# Altium PCB MainBoard.PcbDoc (part 2 of 2)
Units mm, origin at the board's own origin, x right, y up, seen from the top; angles counter-clockwise.
Board outline 100 x 91.6 mm, 4 copper layers (Top Signal, GND, PWR, Bottom Signal), stack 1.586 mm thick; 83 components, 119 nets, 486 pads, 208 vias.
Unrouted connection lines stored in the file: 7.
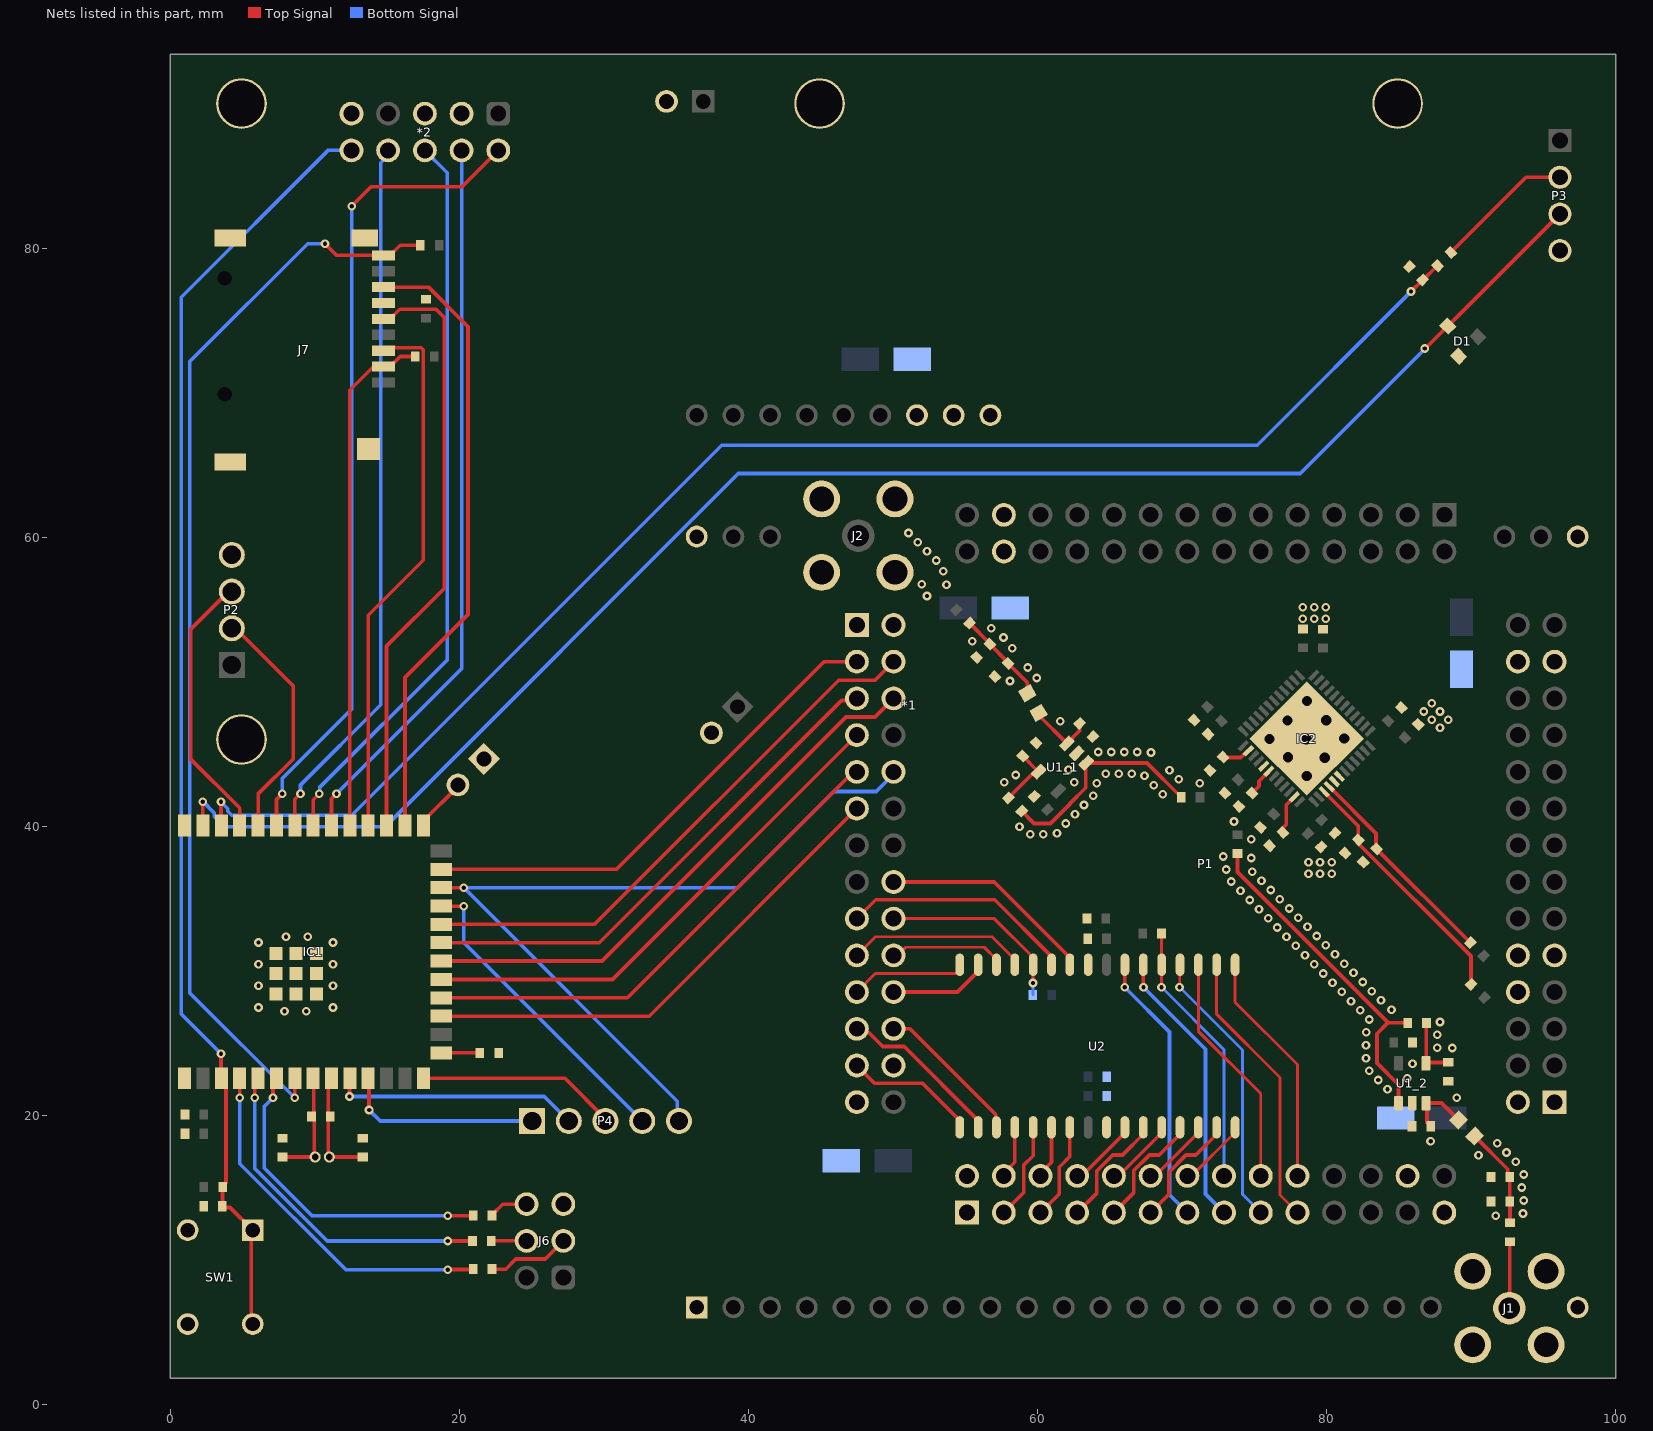
[diagram p4: the nets of this part, all layers, seen from the top]

## Via types
v1: diameter 0.6, hole 0.3, Top Signal to Bottom Signal, 117 vias
v2: diameter 0.6, hole 0.3, Top Signal to Bottom Signal, tented both sides, 82 vias
v3: diameter 1.27, hole 0.711, Top Signal to Bottom Signal, 9 vias

## Nets (pads, with @x,y where several pads share a name; then routed paths per layer and width w, separated by ;. In a path a pad name is that pad's centre, name@x,y a point inside that pad or via, vN(x,y) a via of type N, cw(c..) or ccw(c..) an arc to the next point about the centre after c; other vN are vias at no path point) (continued)
ANALOG_INB: J1.1 R15_2.1 | length 4.6
  Top Signal w0.264: J1.1@92.65,6.65 92.675,6.675 92.675,11.225 R15_2.1@92.7,11.25
CLK_32_N: C17.1 IC1.9 R5.2 Y1.1 | length 8.3
  Top Signal w0.254: IC1.9@11.15,22.55 10.915,22.315 R5.2@10.915,20.062 ; C17.1@13.315,17.112 10.915,17.112 10.915,19.762 R5.2@11.065,19.912 ; R5.2@10.915,20.062 R5.2@11.065,19.912 ; R5.2@10.915,20.062 R5.2@11.065,19.912
CLK_32_P: C18.1 IC1.8 R5.1 Y1.2 | length 8.2
  Top Signal w0.254: C18.1@7.765,17.112 10.115,17.112 10.115,17.22 9.963,17.371 9.963,19.714 R5.1@9.765,19.912 ; IC1.8@9.88,22.55 9.913,22.517 R5.1@9.913,20.061 ; R5.1@9.765,19.912 R5.1@9.913,20.061 ; R5.1@9.765,19.912 R5.1@9.913,20.061
ESP32.CS: IC1.18 P1.76 | length 35.6
  Top Signal w0.254: IC1.18@18.75,28.125 31.625,28.125 47.3,43.8 P1.76@47.853,43.8
ESP32.DATA_IRQ: IC1.25 P1.82 | length 34.7
  Top Signal w0.254: IC1.25@18.75,37.015 30.865,37.015 45.23,51.38 P1.82@47.5,51.38
ESP32.MISO: IC1.21 P1.80 | length 35.8
  Top Signal w0.254: IC1.21@18.75,31.935 29.685,31.935 46.446,48.696 47.356,48.696 P1.80@47.5,48.84
ESP32.MOSI: IC1.19 P1.78 | length 35.8
  Top Signal w0.254: IC1.19@18.75,29.395 30.595,29.395 P1.78@47.5,46.3
ESP32.PPS: IC1.24 P1.75 P4.5 | length 57
  Top Signal w0.254: IC1.24@18.75,35.745 18.755,35.75 v2(20.3,35.75)
  Bottom Signal w0.254: P4.5@35.19,19.6 35.075,19.715 35.075,20.975 v2(20.3,35.75) 39.258,35.75 45.91,42.402 48.852,42.402 50.04,43.59 P1.75@50.04,43.76
ESP32.SCLK: IC1.20 P1.79 | length 38.8
  Top Signal w0.254: IC1.20@18.75,30.665 29.864,30.665 46.749,47.55 48.75,47.55 P1.79@50.04,48.84
ESP32.SIO2: IC1.22 P1.81 | length 38.8
  Top Signal w0.254: IC1.22@18.75,33.205 29.355,33.205 46.246,50.096 48.755,50.096 P1.81@50.04,51.38
ESP32.SIO3: IC1.17 P1.74 | length 34.7
  Top Signal w0.254: IC1.17@18.75,26.855 33.135,26.855 P1.74@47.5,41.22
ESP_EN: *2.10 C21.2 IC1.3 R14.1 SW1.1 SW1.2 | length 89.6
  Top Signal w0.254: v2(3.5,24.25) 3.5,22.58 IC1.3@3.53,22.55 3.85,22.23 3.85,15.322 3.615,15.087 R14.1@3.615,15.037 ; C21.2@3.6,13.7 C21.2@3.608,13.707 ; R14.1@3.608,15.03 C21.2@3.608,13.707 ; SW1.2@5.7,5.55 5.6,5.65 5.6,11.95 SW1.1@5.7,12.05 4.132,13.618 3.697,13.618 C21.2@3.608,13.707
  Bottom Signal w0.254: v2(3.5,24.25) 0.75,27 0.75,76.6 10.91,86.76 *2.10@12.53,86.76
ESP_TCK: *2.4 IC1.32 | length 50.4
  Top Signal w0.254: IC1.32@11.15,40.05 11.15,41.9 v2(11.5,42.25)
  Bottom Signal w0.254: v2(11.5,42.25) 20.16,50.91 20.16,86.75 *2.4@20.15,86.76
ESP_TDI: *2.8 IC1.34 | length 49.4
  Top Signal w0.254: IC1.34@8.61,40.05 8.61,41.86 v2(9,42.25)
  Bottom Signal w0.254: v2(9,42.25) 9,42.85 14.55,48.4 14.55,85.427 14.561,85.438 14.561,85.913 15.07,86.423 *2.8@15.07,86.76
ESP_TDO: *2.6 IC1.33 | length 51.2
  Top Signal w0.254: IC1.33@9.88,40.05 9.88,41.83 v2(10.3,42.25)
  Bottom Signal w0.254: v2(10.3,42.25) 10.328,42.278 10.328,42.678 19.15,51.5 19.15,85.22 *2.6@17.61,86.76
ESP_TMS: *2.2 IC1.35 | length 56.8
  Top Signal w0.254: IC1.35@7.34,40.05 7.34,41.84 v2(7.75,42.25) ; v2(12.54,82.9) 13.89,84.25 20.18,84.25 *2.2@22.69,86.76
  Bottom Signal w0.254: v2(7.75,42.25) 7.75,43.3 12.54,48.09 v2(12.54,82.9)
GND: *1.1 *1.25 *1.26 *1.37 *1.44 *1.45 *1.46 *1.G *2.3 *2.5 *2.9 C1.2 C2.2 C3.2 C4.2 C5.2 C6.1 C7.1 C8.1 C9.1 C10.2 C11.1 C12.1 C13.1 C14.1 C15.1 C16.1 C17.2 C18.2 C19.1 C20.1 C21.1 C22.2 C23_1.1 C23_2.1 C24_1.1 C24_2.1 C25_1.1 C25_2.1 C27_1.1 C27_2.1 C28.1 C29.1 C30.1 C31.1 D1.1 IC1.1 IC1.40 IC1.41 IC1.42 IC1.43 IC1.44 IC1.45 IC1.46 IC1.47 IC1.48 IC1.49 IC2.5 IC2.17 IC2.18 IC2.49 J1.2 J1.3 J1.4 J1.5 J2.2 J2.3 J2.4 J2.5 J3.2 J4.2 J5.1 J6.5 J7.6 J7.G1 J7.G2 J7.G3 J7.G4 P1.1 P1.2 P1.8 P1.9 P1.10 P1.25 P1.26 P1.30 P1.31 P1.55 P1.56 P1.58 P1.59 P1.83 P1.84 P1.109 P1.110 P2.4 P3.4 R1.1 R3.1 R8.2 R9.2 R16_1.1 R16_2.1 R18_1.1 R18_2.1 SW1.3 SW1.4 U1_1.2 U1_2.2 U2.9 U2.25
  other v1: 91.7,13.05 93.6,13.2 93.65,14.1 93.5,15 93.65,15.9 93.085,16.774 90.513,17.22 92.453,17.414 91.816,18.051 87.2,18.2 89,21.2 84.217,21.801 83.581,22.437 85.575,22.548 82.946,23.075 85.95,23.55 82.729,23.948 87.655,24.659 88.7,24.65 82.729,24.848 87.655,25.559 82.75,25.748 87.85,26.45 82.961,26.623 7.9,27.2 9.4,27.2 82.324,27.259 84.5,27.3 6.1,27.45 11.25,27.45 81.688,27.896 83.774,27.945 81.052,28.532 83.137,28.581 6.1,28.95 11.25,28.95 80.415,29.169 82.501,29.217 79.779,29.805 81.864,29.854 6.1,30.45 11.25,30.45 79.142,30.441 81.228,30.49 78.506,31.078 80.592,31.127 77.87,31.714 79.955,31.763 6.1,31.95 11.25,31.95 8,32.35 9.5,32.35 77.233,32.351 79.319,32.399 76.597,32.987 78.682,33.036 75.96,33.623 78.046,33.672 75.324,34.26 77.41,34.309 74.688,34.896 76.773,34.945 74.051,35.533 76.137,35.581 73.415,36.169 75.5,36.218 74.864,36.854 73.05,37 74.8,37.8 72.85,37.9 74.8,39.1 60.403,39.43 59.5,39.45 61.35,39.5 58.75,39.95 61.958,40.182 73.599,40.328 62.594,40.819 63.217,41.468 63.853,42.105 68.677,42.206 68.04,42.843 64.097,42.971 71.23,42.979 57.7,43.05 62.55,43.05 69.774,43.243 67.404,43.479 58.503,43.542 64.716,43.624 65.616,43.624 66.516,43.624 62.15,43.9 69.138,43.879 67.85,45.1 64.207,45.133 65.107,45.133 66.007,45.133 66.907,45.133 61.57,47.254 58.1,50.05 59.95,50.25 59.33,50.975 58.25,52.3 55.488,52.795 57.65,53.05 56.8,53.7 52.358,55.925 53.7,56.7 51.995,56.748 53.489,57.63 52.989,58.378 52.352,59.015 51.716,59.651 51.08,60.288
  other v2: 78.75,36.7 79.55,36.7 80.35,36.7 78.75,37.5 79.55,37.5 80.35,37.5 87.85,46.8 87.284,47.366 88.416,47.366 86.719,47.931 87.85,47.931 87.284,48.497 78.35,54.35 79.15,54.35 79.95,54.35 78.35,55.15 79.15,55.15 79.95,55.15
  other v3: 78.626,43.469 79.883,44.726 77.333,44.762 78.589,46.02 76.057,46.037 81.23,46.073 77.297,47.312 79.973,47.33 78.644,48.659
GPS_RST: IC1.14 P4.3 | length 13.9
  Top Signal w0.254: IC1.14@17.5,22.55 18.556,22.55 27.3,22.55 30.11,19.74 P4.3@30.11,19.6
GPS_RX: IC1.11 P4.1 | length 13.8
  Top Signal w0.254: IC1.11@13.69,22.55 13.75,22.49 v2(13.75,20.365)
  Bottom Signal w0.254: v2(13.75,20.365) 14.515,19.6 P4.1@25.03,19.6
GPS_TX: IC1.10 P4.2 | length 17.1
  Top Signal w0.254: v2(12.4,21.3) 12.4,22.53 IC1.10@12.42,22.55
  Bottom Signal w0.254: v2(12.4,21.3) 25.87,21.3 P4.2@27.57,19.6
GPS_WKP: IC1.23 P4.4 | length 21.5
  Top Signal w0.254: IC1.23@18.75,34.475 18.775,34.45 v2(20.3,34.45)
  Bottom Signal w0.254: v2(20.3,34.45) 20.3,31.95 P4.4@32.65,19.6
IN-_1: R17_1.1 R18_1.2 U1_1.4 | length 4.4
  Top Signal w0.264: R17_1.1@57.99,41.963 59.689,43.661 59.973,43.661 U1_1.4@60.081,43.77 ; R18_1.2@58.982,44.844 60.056,43.77 U1_1.4@60.081,43.77 ; U1_1.4@60.089,43.778 U1_1.4@60.081,43.77
IN-_2: R17_2.1 R18_2.2 U1_2.4 | length 4.3
  Top Signal w0.264: U1_2.4@86.881,23.584 U1_2.4@86.9,23.603 ; R17_2.1@86.919,26.37 86.9,26.351 U1_2.4@86.9,23.603 ; R18_2.2@88.42,23.657 86.953,23.657 U1_2.4@86.9,23.603
LED0: IC1.4 R4.2 | length 25.1
  Top Signal w0.254: v2(4.8,21.2) IC1.4@4.8,22.55 ; v2(19.2,9.3) 19.225,9.325 20.925,9.325 R4.2@20.95,9.35
  Bottom Signal w0.254: v2(4.8,21.2) 4.8,16.65 12.15,9.3 v2(19.2,9.3)
LED1: IC1.6 R6.2 | length 22.3
  Top Signal w0.254: v2@7.1,21.222 7.1,22.31 IC1.6@7.34,22.55 ; v2(19.2,13.05) R6.2@20.95,13.05
  Bottom Signal w0.254: v2(7.1,21.2) 6.5,20.6 6.5,16.35 9.8,13.05 v2(19.2,13.05)
LED2: IC1.5 R7.1 | length 23.5
  Top Signal w0.254: v2(5.85,21.2) 5.85,22.33 IC1.5@6.07,22.55 ; v2(19.2,11.3) R7.1@20.9,11.3
  Bottom Signal w0.254: v2(5.85,21.2) 5.85,16.3 10.85,11.3 v2(19.2,11.3)
MRAM.A0: P1.37 U2.1 | length 16.4
  Top Signal w0.203: U2.1@73.671,30.412 73.671,27.822 77.989,23.504 P1.37@77.989,15.804
MRAM.A1: P1.38 U2.2 | length 19.5
  Top Signal w0.203: U2.2@72.401,30.412 72.401,26.992 76.781,22.612 76.781,14.472 P1.38@77.989,13.264
MRAM.A2: P1.39 U2.3 | length 16.4
  Top Signal w0.203: U2.3@71.131,30.412 71.131,25.812 75.449,21.494 P1.39@75.449,15.804
MRAM.A3: P1.40 U2.4 | length 19.5
  Top Signal w0.203: v2(69.831,28.862) 69.846,28.877 69.846,30.397 U2.4@69.861,30.412
  Bottom Signal w0.203: v2(69.831,28.862) 74.181,24.512 74.181,14.532 P1.40@75.449,13.264
MRAM.A4: P1.66 U2.13 | length 12.5
  Top Signal w0.203: P1.66@47.5,31.06 48.79,32.35 56.86,32.35 58.431,30.779 U2.13@58.431,30.412
MRAM.A5: P1.65 U2.14 | length 8.1
  Top Signal w0.203: P1.65@50.04,31.06 50.322,31.06 50.882,31.62 56.32,31.62 57.161,30.779 U2.14@57.161,30.412
MRAM.A6: P1.63 U2.15 | length 6.9
  Top Signal w0.254: P1.63@50.04,28.52 54.474,28.52 55.891,29.937 U2.15@55.891,30.412
MRAM.A7: P1.64 U2.16 | length 8.1
  Top Signal w0.203: P1.64@47.5,28.52 48.78,29.8 54.376,29.8 54.621,30.044 U2.16@54.621,30.412
MRAM.A8: P1.60 U2.17 | length 9.2
  Top Signal w0.254: P1.60@47.5,23.44 48.739,22.2 52.057,22.2 54.621,19.637 U2.17@54.621,19.162
MRAM.A9: P1.62 U2.18 | length 11.5
  Top Signal w0.254: P1.62@47.5,25.98 47.767,25.713 48.337,25.713 49.3,24.75 50.777,24.75 55.891,19.637 U2.18@55.891,19.162
MRAM.A10: P1.61 U2.19 | length 10.4
  Top Signal w0.254: P1.61@50.04,25.98 51.17,25.98 57.109,20.041 57.109,19.213 U2.19@57.161,19.162
MRAM.A11: P1.53 U2.20 | length 3.7
  Top Signal w0.254: P1.53@57.669,15.804 57.669,15.985 58.431,16.747 U2.20@58.431,19.162
MRAM.A12: P1.54 U2.21 | length 6.7
  Top Signal w0.254: P1.54@57.669,13.264 59.05,14.645 59.05,16.55 59.701,17.201 U2.21@59.701,19.162
MRAM.A13: P1.48 U2.29 | length 8.2
  Top Signal w0.254: P1.48@65.289,13.264 66.65,14.625 66.65,16.151 67.743,17.245 68.418,17.245 69.861,18.687 U2.29@69.861,19.162
MRAM.A14: P1.45 U2.30 | length 4.9
  Top Signal w0.254: P1.45@67.829,15.804 68.154,15.804 71.131,18.78 U2.30@71.131,19.162
MRAM.A15: P1.46 U2.31 | length 8.2
  Top Signal w0.254: P1.46@67.829,13.264 69.081,14.516 69.081,16.042 70.283,17.245 70.958,17.245 72.401,18.687 U2.31@72.401,19.162
MRAM.A16: P1.43 U2.32 | length 4.9
  Top Signal w0.203: P1.43@70.369,15.804 70.68,15.804 73.671,18.794 U2.32@73.671,19.162
MRAM.D0: P1.42 U2.6 | length 19.5
  Top Signal w0.254: U2.6@67.321,30.412 67.326,30.407 67.326,28.867 v2(67.331,28.862)
  Bottom Signal w0.254: v2(67.331,28.862) 71.631,24.562 71.631,14.542 P1.42@72.909,13.264
MRAM.D1: P1.44 U2.7 | length 19
  Top Signal w0.254: v2(66.031,28.862) 66.041,28.872 66.041,30.402 U2.7@66.051,30.412
  Bottom Signal w0.254: v2(66.031,28.862) 69.131,25.762 69.131,14.502 P1.44@70.369,13.264
MRAM.D2: P1.69 U2.10 | length 14.9
  Top Signal w0.254: P1.69@50.04,36.14 57.01,36.14 62.241,30.909 U2.10@62.241,30.412
MRAM.D3: P1.68 U2.11 | length 16.2
  Top Signal w0.254: P1.68@47.5,33.6 48.8,34.9 57.05,34.9 60.971,30.979 U2.11@60.971,30.412
MRAM.D4: P1.51 U2.22 | length 3.7
  Top Signal w0.254: P1.51@60.209,15.804 60.209,15.985 60.971,16.747 U2.22@60.971,19.162
MRAM.D5: P1.52 U2.23 | length 6.7
  Top Signal w0.254: P1.52@60.209,13.264 61.5,14.555 61.5,16.4 62.241,17.141 U2.23@62.241,19.162
MRAM.D6: P1.49 U2.26 | length 4.9
  Top Signal w0.254: P1.49@62.749,15.804 63.074,15.804 66.051,18.78 U2.26@66.051,19.162
MRAM.D7: P1.50 U2.27 | length 8.2
  Top Signal w0.254: P1.50@62.749,13.264 64.11,14.625 64.11,16.151 65.203,17.245 65.878,17.245 67.321,18.687 U2.27@67.321,19.162
MRAM.EN: P1.41 R19.1 U2.5 | length 18.6
  Top Signal w0.203: v2(68.581,28.862) 68.586,28.867 68.586,30.407 U2.5@68.591,30.412 68.586,30.417 68.586,32.557 R19.1@68.581,32.562
  Bottom Signal w0.203: v2(68.581,28.862) 72.909,24.534 P1.41@72.909,15.804
MRAM.OUTPUT_EN: P1.47 U2.28 | length 4.9
  Top Signal w0.254: P1.47@65.289,15.804 65.614,15.804 68.591,18.78 U2.28@68.591,19.162
MRAM.WRITE_EN: P1.67 R20.1 U2.12 | length 13.4
  Top Signal w0.203: P1.67@50.04,33.6 57.014,33.6 59.701,30.914 U2.12@59.701,30.412 59.697,30.408 59.697,29.153 v2(59.694,29.15)
  Bottom Signal w0.203: R20.1@59.681,28.312 59.687,28.318 59.687,29.143 v2(59.694,29.15)
NetC10_1: C10.1 IC2.2 | length 2
  Top Signal w0.264: C10.1@72.85,44.781 72.885,44.746 74.065,44.746 74.531,45.212 IC2.2@74.599,45.212
NetC13_2: C13.2 IC2.6 | length 2
  Top Signal w0.264: C13.2@74.85,42.281 75.327,42.758 75.327,43.11 IC2.6@76.013,43.797
NetC14_2: C14.2 IC2.11 | length 2.8
  Top Signal w0.264: C14.2@76.981,39.562 76.945,39.597 76.945,39.842 77.211,40.108 77.211,41.46 IC2.11@77.781,42.03
NetC23_1_2: C23_1.2 L1_1.1 R15_1.2 R16_1.2 | length 6.5
  Top Signal w0.264: R15_1.2@55.3,54.05 56.7,52.65 R16_1.2@56.7,52.6 57.969,51.331 C23_1.2@57.969,51.269 59.295,49.943 59.295,49.205 L1_1.1@59.3,49.2
NetC23_2_2: C23_2.2 L1_2.1 R15_2.2 R16_2.2 | length 7
  Top Signal w0.264: L1_2.1@90.25,18.55 92.535,16.265 92.535,15.87 R16_2.2@92.678,15.727 C23_2.2@92.678,14.03 92.689,14.019 92.689,12.561 R15_2.2@92.7,12.55
NetC26_1_2: C26_1.2 R17_1.2 U1_1.1 | length 15.1
  Top Signal w0.264: R17_1.2@58.91,41.043 59.769,40.184 60.892,40.184 62.252,41.544 62.252,41.571 63.342,42.66 63.342,44.344 U1_1.1@63.377,44.379 67.571,44.379 C26_1.2@69.95,42
NetC26_2_2: C26_2.2 R17_2.2 U1_2.1 | length 24.2
  Top Signal w0.264: C26_2.2@73.831,38.112 73.831,36.82 84.248,26.403 ; U1_2.1@84.781,20.634 84.831,20.634 84.981,20.784 U1_2.1@84.981,20.834 84.981,22.104 83.483,23.602 83.483,25.639 84.248,26.403 ; R17_2.2@85.586,26.403 84.248,26.403
NetIC1_15: IC1.15 R1.2 | length 2.7
  Top Signal w0.254: IC1.15@18.75,24.315 18.753,24.312 R1.2@21.415,24.312
NetIC1_27: IC1.27 J5.2 | length 3.8
  Top Signal w0.254: IC1.27@17.5,40.05 17.5,40.35 19.902,42.752 J5.2@19.902,42.852
NetIC1_36: IC1.36 P2.2 | length 16.6
  Top Signal w0.254: P2.2@4.25,53.69 4.51,53.69 8.5,49.7 8.5,44.65 6.07,42.22 IC1.36@6.07,40.05
NetIC1_37: IC1.37 P2.3 | length 18.9
  Top Signal w0.254: P2.3@4.25,56.23 4.03,56.23 1.4,53.6 1.4,44.65 4.8,41.25 IC1.37@4.8,40.05
NetIC2_15: IC2.15 R8.1 R10.2 | length 17.6
  Top Signal w0.264: IC2.15@79.832,42.383 82.2,40.015 82.2,39.365 82.165,39.33 82.2,39.295 82.2,38.805 90,31.005 R10.2@90,29.05
NetIC2_16: IC2.16 R9.1 R11.1 | length 14.8
  Top Signal w0.264: IC2.16@80.185,42.737 83.427,39.495 83.427,38.465 R11.1@89.955,31.937
NetJ6_3: J6.3 R4.1 | length 5.7
  Top Signal w0.254: R4.1@22.25,9.35 23.2,9.35 23.9,10.05 25.936,10.05 J6.3@27.19,11.304
NetJ6_4: J6.4 R7.2 | length 2.5
  Top Signal w0.254: R7.2@22.2,11.3 22.202,11.302 24.648,11.302 J6.4@24.65,11.304
NetJ6_6: J6.6 R6.1 | length 2.8
  Top Signal w0.254: R6.1@22.25,13.05 22.25,13.1 22.994,13.844 J6.6@24.65,13.844
NetP3_2: P3.2 R2.1 | length 9.7
  Top Signal w0.254: R2.1@88.604,79.695 93.809,84.9 P3.2@96.15,84.9
NEXTION_RX: IC1.38 R2.2 R3.2 | length 102.1
  Top Signal w0.254: v2(3.5,41.7) 3.5,40.08 IC1.38@3.53,40.05 ; v1(85.85,77) R3.2@86.65,77.8 86.679,77.8 87.655,78.776 R2.2@87.684,78.776
  Bottom Signal w0.254: v2(3.5,41.7) 3.5,41.68 3.971,41.208 3.971,41.029 4.25,40.75 12.55,40.75 38.15,66.35 75.2,66.35 v1(85.85,77)
NEXTION_TX: D1.3 IC1.39 P3.3 | length 114
  Top Signal w0.254: v2(2.25,41.7) 2.25,40.06 IC1.39@2.26,40.05 ; v1(86.8,73.05) 86.836,73.05 D1.3@88.393,74.607 88.397,74.607 P3.3@96.15,82.36
  Bottom Signal w0.254: v2(2.25,41.7) 3.033,40.917 3.033,40.667 3.75,39.95 14.85,39.95 39.3,64.4 78.19,64.4 86.8,73.01 v1(86.8,73.05) ; P3.3@96.13,82.36 P3.3@96.15,82.36
OP_AMP_INA+: C24_1.2 L1_1.2 U1_1.3 | length 4.7
  Top Signal w0.264: L1_1.2@60.085,47.84 60.085,47.671 U1_1.3@62.034,45.722 62.912,46.6 C24_1.2@62.912,47.11
OP_AMP_INB+: C24_2.2 L1_2.2 U1_2.3 | length 4.5
  Top Signal w0.264: C24_2.2@87.212,19.238 86.956,19.494 86.956,20.759 U1_2.3@86.881,20.834 87.966,20.834 L1_2.2@89.14,19.66
SD_CS: IC1.31 J7.2 R12.1 | length 35.7
  Top Signal w0.254: IC1.31@12.42,40.05 12.42,70.17 14.175,71.925 14.625,71.925 J7.2@14.75,71.8 15.2,71.8 15.9,72.5 R12.1@16.95,72.5
SD_DETECT: IC1.7 J7.CD1 R13.1 | length 75.3
  Top Signal w0.254: v2(8.6,21.2) 8.6,22.54 IC1.7@8.61,22.55 ; v2(10.7,80.3) 11.5,79.5 15.2,79.5 15.9,80.2 R13.1@17.3,80.2
  Bottom Signal w0.254: v2(8.6,21.2) 1.35,28.45 1.35,72.15 9.5,80.3 v2(10.7,80.3)
SD_MISO: IC1.28 J7.7 | length 43.3
  Top Signal w0.254: J7.7@14.75,77.3 17.859,77.3 20.6,74.559 20.6,54.65 16.23,50.28 IC1.28@16.23,40.05
SD_MOSI: IC1.30 J7.3 | length 37.4
  Top Signal w0.254: IC1.30@13.69,40.05 13.69,54.59 17.504,58.404 17.504,72.955 17.355,73.104 14.954,73.104 J7.3@14.75,72.9
SD_SCK: IC1.29 J7.5 | length 41.5
  Top Signal w0.254: J7.5@14.75,75.1 15.2,75.1 15.867,75.767 18.383,75.767 18.95,75.2 18.95,56.45 14.96,52.46 IC1.29@14.96,40.05
pads on no net: *1.2 *1.3 *1.4 *1.5 *1.6 *1.7 *1.8 *1.9 *1.10 *1.11 *1.12 *1.13 *1.14 *1.15 *1.16 *1.17 *1.18 *1.19 *1.20 *1.21 *1.28 *1.35 *1.36 *1.40 *1.43 *2.7 D1.2 IC1.12 IC1.13 IC1.16 IC1.26 IC2.8 J6.1 J6.2 J7.1 J7.8 J7.MH1 J7.MH2 P1.3 P1.4 P1.11 P1.12 P1.13 P1.14 P1.19 P1.20 P1.32 P1.33 P1.34 P1.35 P1.36 P1.70 P1.71 P1.72 P1.73 P1.77 P1.103 P1.105 P1.107 P1.108

## Polygon pours and split planes (outlines as drawn)
GND on Top Signal "GND_L01_P045" (solid, remove dead copper, pour order 45): 0,1.8 0,93.4 100,93.4 100,1.8
3V3 on Top Signal "NONET_L-01_P-001" (solid, pour order 36): 77.65,41.5 78.3,42.15 78.4,42.15 78.65,41.9 78.7,41.9 78.9,42.1 79.55,41.45 80.55,40.45 80.55,40.05 79,38.5 77.85,39.65 77.8,39.65 77.65,39.8
3V3_PWR_PCB on Top Signal "NONET_L-01_P-001" (solid, pour order 0): 16.35,73.7 15.75,74.3 14.4,74.3 14.4,75.05 15.95,75.05 16.45,75.55 18.25,75.55 18.75,75.05 18.75,70.85
3V3_PWR_PCB on Top Signal "NONET_L-01_P-001" (solid, pour order 32): 1.8,23.3 2.7,23.3 2.8,23.2 2.8,21.65 3.45,21 3.45,15.15 2.75,14.45 1.8,14.45
3V3 on Top Signal "NONET_L-01_P-001" (solid, pour order 41): 78.95,49.95 79,49.95 80.3,51.25 80.3,53.1 80.2,53.2 77.95,53.2 77.95,50.95 78.8,50.1
3V3 on Top Signal "NONET_L-01_P-001" (solid, pour order 14): 82.55,46.4 84.4,48.25 84.6,48.25 84.6,48.2 86.35,46.45 85.5,45.6 83.35,45.6 82.6,46.35 82.55,46.35
3V3 on Top Signal "NONET_L-01_P-001" (solid, pour order 15): 74.05,47.05 74.7,46.4 74.5,46.2 74.5,45.9 74.65,45.75 73.95,45.05 73.65,45.05 73.65,45.15 70.75,48.05 71.6,48.9 72.2,48.9 74.4,46.7
3V3 on Top Signal "NONET_L-01_P-001" (solid, pour order 18): 63,34.75 63.05,34.8 66.15,34.8 67.75,32.9 67.75,32.05 65.7,32.05 65.05,31.4 65.05,31.35 64.45,31.35 64.1,31.7 64.1,33.85 63.85,34.1 63,34.1
3V3 on PWR "NONET_L-01_P-001" (solid, pour order 29): 89.55,12 89.55,21.2 87.445,25.9 83.45,25.9 83.45,15.6 87,12.05
no net on PWR "NONET_L-01_P-001" (solid, pour order 28): 53.8,62.85 53.897,62.947 58.447,62.947 58.447,62.603 60.25,60.8 61.95,57.211 61.95,40.75 59.4,40.75 53.9,46.25 53.9,47
GND on PWR "GND_L03_P047" (solid, remove dead copper, pour order 47): 0,1.8 0,93.4 100,93.4 100,1.8
3V3 on PWR "NONET_L-01_P-001" (solid, pour order 44): 48.9,22 51.5,24.95 61.6,35.05 66.05,35.05 66.4,34.7 66.4,19.75 48.9,19.75
3V3 on PWR "NONET_L-01_P-001" (solid, pour order 37): 71,52.55 92.4,55.9 97,55.25 96.95,55.2 96.95,50.35 89.225,42.625 81.129,38.171 70.65,39.4
3V3_PWR_PCB on PWR "NONET_L-01_P-001" (solid, pour order 39): 40.45,69.6 47.75,69.6 47.75,55.45 46.3,55.45 4.5,14.65 0.05,14.65 0.05,80.45 21.65,80.75 27.65,71.2 30.75,67.6 40.45,67.6
no net on Top Solder "NONET_L-01_P-001" (solid, pour order 46): 13.6,79.65 13.6,80.5 15.6,80.5 15.6,79.65
no net on Top Solder "NONET_L-01_P-001" (solid): 9.55,17.6 11.45,17.6 11.45,16.6 9.55,16.6
no net on Top Solder "NONET_L-01_P-001" (solid): 73.789,45.38 74.5,46.05 73.78,46.758 77.955,50.886 78.63,50.288 79.354,50.904 83.501,46.757 82.795,46.055 83.501,45.349 79.324,41.172 79.247,41.247 78.607,41.867 77.955,41.215
no net on Bottom Solder "NONET_L-01_P-001" (solid): 9.55,17.6 11.45,17.6 11.45,16.6 9.55,16.6
no net on Bottom Solder "NONET_L-01_P-001" (solid): 9.7,17.5 11.3,17.5 11.3,16.65 9.7,16.65
GND on Bottom Signal "GND_L04_P040" (solid, remove dead copper, pour order 40): 0,1.8 0,93.4 100,93.4 100,1.8
GND on GND "GND_L02_P038" (solid, remove dead copper, pour order 38): 0,1.8 0,93.4 100,93.4 100,1.8

## Keep-outs
Keep-Out Layer:
  the board outline again, w0.127

## Other copper
Top Signal:
  pour cut-out: 51.95,49.5 51.4,49.5 51.4,36.95 69.535,35.551 79.52,27.02 79.52,11.35 79.85,11.35 79.85,18.75 79.85,27.35 69.715,36.14 51.95,37.55
GND:
  pour cut-out: 51.95,49.5 51.4,49.5 51.4,36.95 69.535,35.551 79.52,27.02 79.52,11.35 79.85,11.35 79.85,18.75 79.85,27.35 69.715,36.14 51.95,37.55
PWR:
  pour cut-out: 51.95,49.5 51.4,49.5 51.4,36.95 69.535,35.551 79.52,27.02 79.52,11.35 79.85,11.35 79.85,18.75 79.85,27.35 69.715,36.14 51.95,37.55
Bottom Signal:
  pour cut-out: 51.95,49.5 51.4,49.5 51.4,36.95 69.535,35.551 79.52,27.02 79.52,11.35 79.85,11.35 79.85,18.75 79.85,27.35 69.715,36.14 51.95,37.55

## Silkscreen, mask and mechanical layers (free items; w line width, h text height)
Top Overlay:
  text "GND" at 35.007,92.687 h0.58 r180
  text "GND" at 13.344,92.65 h0.58 r180
  text "5V" at 37.42,92.637 h0.58 r180
  text "GND" at 18.365,92.509 h0.58 r180
  text "GND" at 20.898,92.498 h0.58 r180
  text "3V3" at 23.548,92.498 h0.58 r180
  text "RST" at 13.298,91.598 h0.58 r180
  text "TDI" at 15.848,91.598 h0.58 r180
  text "TDO" at 18.348,91.548 h0.58 r180
  text "TCK" at 20.898,91.498 h0.58 r180
  text "TMS" at 23.548,91.448 h0.58 r180
  text "RF PWR" at 38.896,87.396 h1.27 r180
  text "5V" at 99.048,86.952 h0.58 r90
  text "RX" at 99.048,84.352 h0.58 r90
  text "JTAG" at 13.446,83.896 h1.27 r180
  text "ESP32-S3" at 25.046,83.896 h1.27 r180
  text "TX" at 99.048,81.852 h0.58 r90
  text "GND" at 99.048,79.052 h0.58 r90
  text "NEXTION CONN" at 92.896,76.104 h1.27 r90
  text "3V3" at 45.802,70.102 h0.58
  text "3V3" at 43.352,70.002 h0.58
  text "5V" at 38.502,69.952 h0.58
  text "5V" at 35.852,69.902 h0.58
  text "3V3" at 54.402,64.602 h0.58
  text "SD CARD" at 10.446,63.646 h1.27 r180
  text "3V3" at 54.352,63.452 h0.58
  text "SDIN" at 67.85,63.444 h0.58 r45
  text "DORA" at 70.45,63.344 h0.58 r45
  text "A6" at 75.7,63.344 h0.58 r45
  text "A4" at 78.1,63.344 h0.58 r45
  text "B9" at 85.6,63.344 h0.58 r45
  text "B7" at 88.194,63.346 h0.58 r45
  text "A8" at 72.994,63.296 h0.58 r45
  text "A2" at 80.644,63.296 h0.58 r45
  text "A1" at 83.294,63.296 h0.58 r45
  text "5V" at 38.453,61.436 h0.58
  text "ESP32-S3" at 11.754,59.796 h1.27 r270
  text "GND" at 0.552,59.498 h0.58 r270
  text "UART" at 9.104,57.196 h1.27 r270
  text "RF A" at 40.409,57.15 h1.27 r315
  text "TX" at 0.534,56.639 h0.58 r270
  text "B8" at 85.344,56.146 h0.58 r45
  text "B6" at 87.944,56.146 h0.58 r45
  text "CS" at 64.9,56.094 h0.58 r45
  text "A3" at 80.144,56.096 h0.58 r45
  text "A0" at 82.794,56.096 h0.58 r45
  text "A5" at 77.594,55.996 h0.58 r45
  text "A7" at 75.144,55.896 h0.58 r45
  text "A9" at 72.6,55.844 h0.58 r45
  text "SHDN" at 61.5,55.294 h0.58 r45
  text "SCLK" at 66.55,55.144 h0.58 r45
  text "DCLKA" at 68.9,54.844 h0.58 r45
  text "RX" at 0.534,54.189 h0.58 r270
  text "GPS PWR" at 37.95,53.791 h1.27 r225
  text "3V3" at 97.652,53.652 h0.58
  text "3V3" at 0.534,51.939 h0.58 r270
  text "D_IRQ" at 42.902,51.199 h0.58
  text "SIO2" at 51.944,51.182 h0.58
  text "5V" at 37.9,50.556 h0.58 r225
  text "GND" at 36.15,48.756 h0.58 r225
  text "MISO" at 43.402,48.702 h0.58
  text "SCLK" at 52.002,48.652 h0.58
  text "B5" at 97.552,48.652 h0.58
  text "B4" at 90.352,48.552 h0.58
  text "BOOT" at 20.05,47.791 h1.27 r225
  text "B2" at 97.552,46.152 h0.58
  text "B3" at 90.252,46.052 h0.58
  text "MOSI" at 43.402,45.802 h0.58
  text "PPS" at 52.052,43.402 h0.58
  text "CS" at 44.402,43.352 h0.58
  text "B1" at 97.602,41.052 h0.58
  text "SIO3" at 43.302,41.002 h0.58
  text "B0" at 90.393,40.987 h0.58
  text "DORB" at 89.152,38.452 h0.58
  text "DCLKB" at 98.198,37.452 h0.58 r90
  text "D2" at 52.202,35.852 h0.58
  text "W_EN" at 52.052,33.449 h0.58
  text "D3" at 45.548,33.152 h0.58 r90
  text "A5" at 52.152,30.852 h0.58
  text "A4" at 44.548,30.252 h0.58 r90
  text "A5" at 45.513,30.243 h0.58 r90
  text "A7" at 44.598,27.802 h0.58 r90
  text "CLK-" at 98.248,27.752 h0.58 r90
  text "A6" at 45.513,27.743 h0.58 r90
  text "CLK-" at 89.252,25.702 h0.58
  text "A9" at 44.598,25.552 h0.58 r90
  text "A10" at 45.563,25.543 h0.58 r90
  text "SYNC" at 98.248,24.852 h0.58 r90
  text "GPS" at 28.654,24.704 h1.27
  text "A8" at 44.598,23.152 h0.58 r90
  text "WKP" at 32.052,22.902 h0.58
  text "PPS" at 34.602,22.902 h0.58
  text "TX" at 27.052,22.852 h0.58
  text "RST" at 29.452,22.852 h0.58
  text "RX" at 24.552,22.802 h0.58
  text "LED" at 29.494,12.937 h1.27 r270
  text "RESET" at 8.304,11.646 h1.27 r270
  text "A11" at 57.002,10.902 h0.58
  text "A0" at 77.552,10.902 h0.58
  text "3V3" at 86.902,10.902 h0.58
  text "D4" at 59.752,10.852 h0.58
  text "D6" at 62.202,10.852 h0.58
  text "O_EN" at 64.252,10.849 h0.58
  text "A2" at 74.952,10.852 h0.58
  text "A16" at 69.852,10.752 h0.58
  text "EN" at 72.402,10.752 h0.58
  text "A14" at 67.352,10.702 h0.58
  text "A12" at 56.993,9.937 h0.58
  text "A1" at 77.543,9.937 h0.58
  text "D5" at 59.743,9.887 h0.58
  text "D7" at 62.193,9.887 h0.58
  text "A3" at 74.943,9.887 h0.58
  text "GND" at 86.852,9.852 h0.58
  text "A13" at 64.552,9.802 h0.58
  text "D1" at 69.843,9.787 h0.58
  text "D0" at 72.393,9.787 h0.58
  text "A15" at 67.343,9.737 h0.58
  text "RF B" at 98.427,8.99 h1.27 r90
  text "Simonas Riauka V2 2024" at 16.852,3.652 h0.58

## Text inside footprints (layer, text, board x,y; h text height)
C1: Bottom Overlay "+" at 52.922,54.6 h1.22
C2: Bottom Overlay "+" at 89.978,20.3 h1.22 r180
C3: Bottom Overlay "+" at 88.85,56.05 h1.22 r270
C4: Bottom Overlay "+" at 51.628,17.35 h1.22 r180
C5: Bottom Overlay "+" at 46.145,71.809 h1.22
P1: Top Overlay "P4" at 93.29,18.925 h0.76 r180; Top Overlay "P2" at 45.048,19.652 h0.76 r90; Top Overlay "P3" at 52.802,12.854 h0.76 r180